# EAGLE board print_2 (EAGLE 5.11)
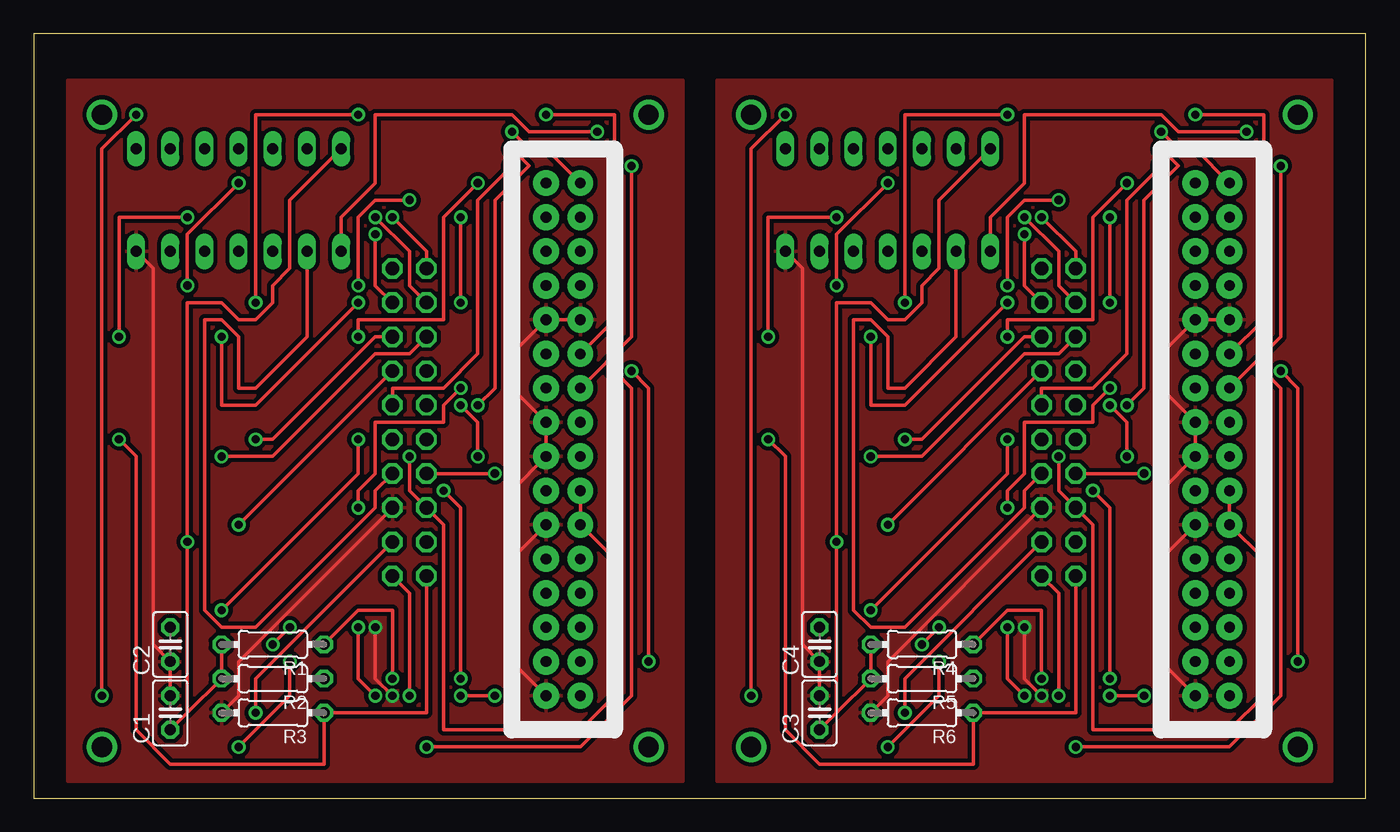
[diagram p0: board, top side]
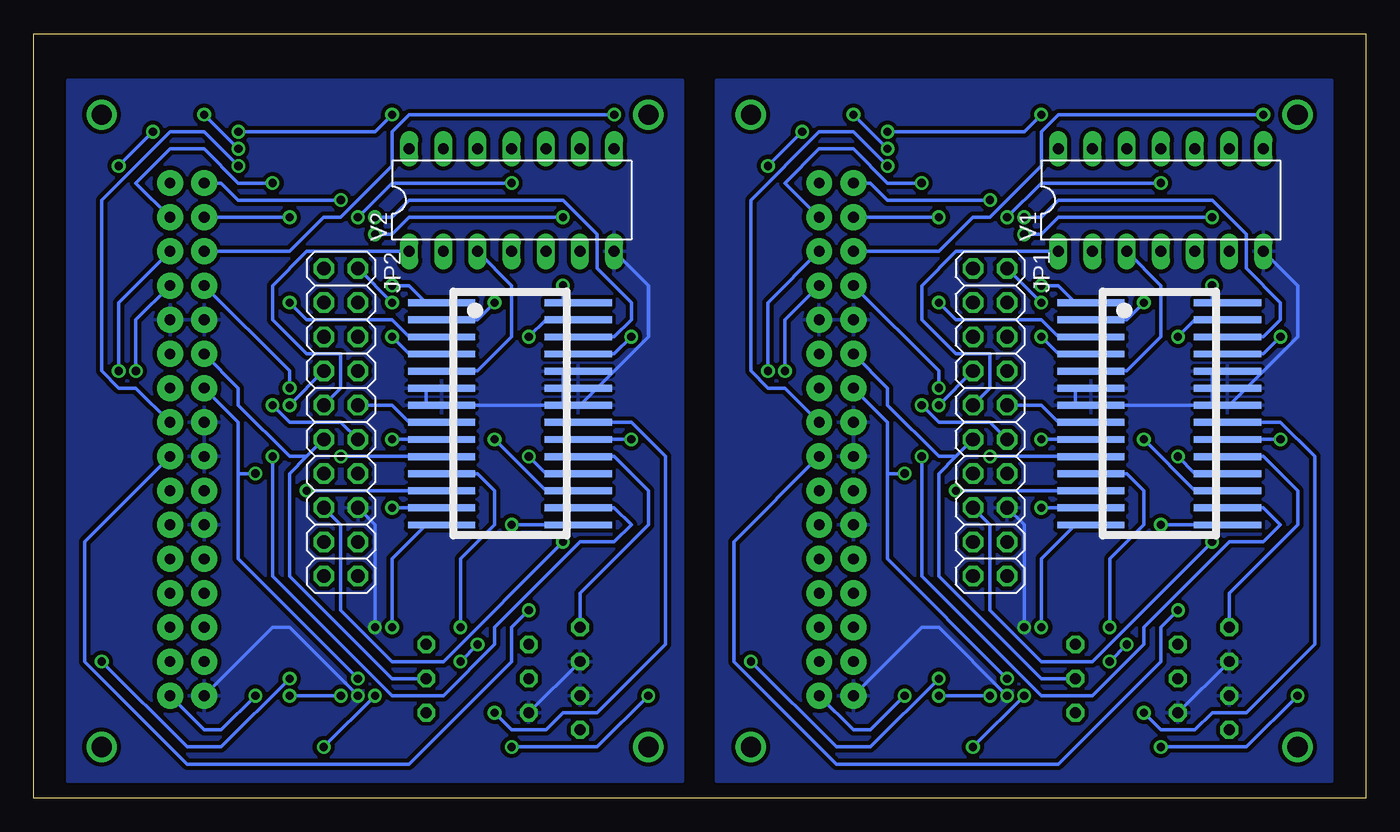
[diagram p1: board, bottom side, seen from below]

Size 99.04 x 56.82 mm. Coordinates in mm from the lower left corner, seen from the top.
Outline: 0,0 99.04,0 99.04,56.82 0,56.82 0,0
Copper layers (1*16): Top 0.035mm / dielectric 1.5mm / Bottom 0.035mm
Design rules "default": minimum track width 10mil, minimum drill 24mil, track to track 8mil, track to pad 8mil, pad to pad 8mil, via to via 8mil, smd to smd 8mil, copper to edge 40mil, drill to drill 8mil, minimum pad ring 10mil, minimum via ring 8mil, stop-mask expansion 4mil, vias tented up to drill 0mil, thermal gap 10mil

## Footprints (pad centres in the part's own frame; a part is rotated, then mirrored left to right if it is on the bottom)
C025-025X050 = drill 0.813 octagon: 1 -1.27,0; 2 1.27,0
2X10 = drill 1.016 octagon: 1 -11.43,-1.27; 2 -11.43,1.27; 3 -8.89,-1.27; 4 -8.89,1.27; 5 -6.35,-1.27; 6 -6.35,1.27; 7 -3.81,-1.27; 8 -3.81,1.27; 9 -1.27,-1.27; 10 -1.27,1.27; 11 1.27,-1.27; 12 1.27,1.27; 13 3.81,-1.27; 14 3.81,1.27; 15 6.35,-1.27; 16 6.35,1.27; 17 8.89,-1.27; 18 8.89,1.27; 19 11.43,-1.27; 20 11.43,1.27
0204/7 = drill 0.813 octagon: 1 -3.81,0; 2 3.81,0
AL422 = smd 5 x 0.51: 1 -5.21,7.61; 2 -5.21,6.34; 3 -5.21,5.07; 4 -5.21,3.8; 5 -5.21,2.53; 6 -5.21,1.26; 7 -5.21,-0.01; 8 -5.21,-1.28; 9 -5.21,-2.55; 10 -5.21,-3.82; 11 -5.21,-5.09; 12 -5.21,-6.36; 13 -5.21,-7.63; 14 -5.21,-8.9; 15 4.95,-8.9; 16 4.95,-7.63; 17 4.95,-6.36; 18 4.95,-5.09; 19 4.95,-3.82; 20 4.95,-2.55; 21 4.95,-1.28; 22 4.95,-0.01; 23 4.95,1.26; 24 4.95,2.53; 25 4.95,3.8; 26 4.95,5.07; 27 4.95,6.34; 28 4.95,7.61
C3088MODULE = drill 0.8 pad 1.93 round: P$1 -1.27,19.05; P$2 1.27,19.05; P$3 -1.27,16.51; P$4 1.27,16.51; P$5 -1.27,13.97; P$6 1.27,13.97; P$7 -1.27,11.43; P$8 1.27,11.43; P$9 -1.27,8.89; P$10 1.27,8.89; P$11 -1.27,6.35; P$12 1.27,6.35; P$13 -1.27,3.81; P$14 1.27,3.81; P$15 -1.27,1.27; P$16 1.27,1.27; P$17 -1.27,-1.27; P$18 1.27,-1.27; P$19 -1.27,-3.81; P$20 1.27,-3.81; P$21 -1.27,-6.35; P$22 1.27,-6.35; P$23 -1.27,-8.89; P$24 1.27,-8.89; P$25 -1.27,-11.43; P$26 1.27,-11.43; P$27 -1.27,-13.97; P$28 1.27,-13.97; P$29 -1.27,-16.51; P$30 1.27,-16.51; P$31 -1.27,-19.05; P$32 1.27,-19.05
DIL14 = drill 0.813 long: 1 -7.62,-3.81; 2 -5.08,-3.81; 3 -2.54,-3.81; 4 0,-3.81; 5 2.54,-3.81; 6 5.08,-3.81; 7 7.62,-3.81; 8 7.62,3.81; 9 5.08,3.81; 10 2.54,3.81; 11 0,3.81; 12 -2.54,3.81; 13 -5.08,3.81; 14 -7.62,3.81

## Placement (x,y rotation side)
C1  0.1uf  [C025-025X050]  10.16,6.35 90 top
C2  22uf  [C025-025X050]  10.16,11.43 90 top
C3  0.1uf  [C025-025X050]  58.42,6.35 90 top
C4  22uf  [C025-025X050]  58.42,11.43 90 top
JP1  [2X10]  27.94,27.94 270 bottom
JP2  [2X10]  76.2,27.94 270 bottom
R1  4k7  [0204/7]  17.78,11.43 180 top
R2  4k7  [0204/7]  17.78,8.89 180 top
R3  1k  [0204/7]  17.78,6.35 180 top
R4  4k7  [0204/7]  66.04,11.43 180 top
R5  4k7  [0204/7]  66.04,8.89 180 top
R6  1k  [0204/7]  66.04,6.35 180 top
U$1  AL422B  [AL422]  15.24,29.21 0 bottom
U$2  C3088MODULE  [C3088MODULE]  39.37,26.67 0 top
U$3  AL422B  [AL422]  63.5,29.21 0 bottom
U$4  C3088MODULE  [C3088MODULE]  87.63,26.67 0 top
V1  74HCT00N  [DIL14]  15.24,44.45 0 bottom
V2  74HCT00N  [DIL14]  63.5,44.45 0 bottom

## Library data of the parts
C1-C4 R1-R6 = rcl
JP1 JP2 = pinhead
U$1-U$4 = Tugas-Akhir-Sistem-Mikroprossesor
V1 V2 = 74ttl-din

## Nets
/FIFO_READ_RESET: JP1.18 U$1.21
/FIFO_READ_RESET1: JP2.18 U$3.21
DATA0: U$1.1 U$2.P$1
DATA1: U$1.2 U$2.P$2
DATA2: U$1.3 U$2.P$3
DATA3: U$1.4 U$2.P$4
DATA4: U$1.11 U$2.P$5
DATA5: U$1.12 U$2.P$6
DATA6: U$1.13 U$2.P$7
DATA7: U$1.14 U$2.P$8
DATA8: U$3.1 U$4.P$1
DATA9: U$3.2 U$4.P$2
DATA10: U$3.3 U$4.P$3
DATA11: U$3.4 U$4.P$4
DATA12: U$3.11 U$4.P$5
DATA13: U$3.12 U$4.P$6
DATA14: U$3.13 U$4.P$7
DATA15: U$3.14 U$4.P$8
FIFO_DATA_OUT0: JP1.1 U$1.28
FIFO_DATA_OUT1: JP1.2 U$1.27
FIFO_DATA_OUT2: JP1.3 U$1.26
FIFO_DATA_OUT3: JP1.4 U$1.25
FIFO_DATA_OUT4: JP1.5 U$1.18
FIFO_DATA_OUT5: JP1.6 U$1.17
FIFO_DATA_OUT6: JP1.7 U$1.16
FIFO_DATA_OUT7: JP1.8 U$1.15
FIFO_DATA_OUT8: JP2.1 U$3.28
FIFO_DATA_OUT9: JP2.2 U$3.27
FIFO_DATA_OUT10: JP2.3 U$3.26
FIFO_DATA_OUT11: JP2.4 U$3.25
FIFO_DATA_OUT12: JP2.5 U$3.18
FIFO_DATA_OUT13: JP2.6 U$3.17
FIFO_DATA_OUT14: JP2.7 U$3.16
FIFO_DATA_OUT15: JP2.8 U$3.15
FIFO_READ_CLOCK: JP1.19 R3.1 U$1.20
FIFO_READ_CLOCK1: JP2.19 R6.1 U$3.20
FIFO_WRITE_ENABLE: JP1.14 V1.2
FIFO_WRITE_ENABLE1: JP2.14 V2.2
GND: C1.2 C2.1 JP1.16 R3.2 U$1.6 U$1.7 U$1.22 U$1.23 U$1.24 U$2.P$9 U$2.P$10 U$2.P$15 U$2.P$17 U$2.P$21 U$2.P$31 V1.7
GND1: C3.2 C4.1 JP2.16 R6.2 U$3.6 U$3.7 U$3.22 U$3.23 U$3.24 U$4.P$9 U$4.P$10 U$4.P$15 U$4.P$17 U$4.P$21 U$4.P$31 V2.7
HORIZONTAL_REFERENCE: JP1.9 U$2.P$14 V1.1
HORIZONTAL_REFERENCE1: JP2.9 U$4.P$14 V2.1
N$1: JP1.20 U$2.P$32
N$2: U$1.5 V1.3
N$3: U$1.9 U$2.P$18
N$10: C2.2 U$1.19
N$11: U$3.5 V2.3
N$12: U$3.9 U$4.P$18
N$13: C4.2 U$3.19
N$14: JP2.20 U$4.P$32
OV6620_FODD: JP1.12 U$2.P$12
OV6620_FODD1: JP2.12 U$4.P$12
OV6620_SCL: JP1.13 R1.1 U$2.P$13
OV6620_SCL1: JP2.13 R4.1 U$4.P$13
OV6620_SDA: JP1.11 R2.1 U$2.P$11
OV6620_SDA1: JP2.11 R5.1 U$4.P$11
VCC: C1.1 JP1.15 R1.2 R2.2 U$1.10 U$2.P$20 U$2.P$22 V1.14
VCC1: C3.1 JP2.15 R4.2 R5.2 U$3.10 U$4.P$20 U$4.P$22 V2.14
VERTICAL_SYNCRONIZATION: JP1.10 U$1.8 U$2.P$16
VERTICAL_SYNCRONIZATION1: JP2.10 U$3.8 U$4.P$16

## Tracks (layer width: path | path; a pad name or v marks a point on that pad's centre or on a via)
/FIFO_READ_RESET  (via drill 0.61)
  Top 0.254: JP1.18 16.51,8.89 v16.51,6.35
  Bottom 0.254: v16.51,6.35 15.24,5.08 12.7,5.08 11.43,6.35 8.89,6.35 3.81,11.43 3.81,25.4 6.35,27.94 10.16,27.94 U$1.21
/FIFO_READ_RESET1  (via drill 0.61)
  Top 0.254: JP2.18 64.77,8.89 v64.77,6.35
  Bottom 0.254: v64.77,6.35 63.5,5.08 60.96,5.08 59.69,6.35 57.15,6.35 52.07,11.43 52.07,25.4 54.61,27.94 58.42,27.94 U$3.21
DATA0  (via drill 0.61)
  Top 0.254: v27.94,44.45 25.4,44.45 24.13,43.18 v24.13,38.1
  Bottom 0.254: U$2.P$1 36.83,45.72 35.56,44.45 v27.94,44.45 | v24.13,38.1 22.86,38.1 21.59,36.83 U$1.1
DATA1  (via drill 0.61)
  Top 0.254: U$2.P$2 38.1,48.26 36.83,48.26 v35.56,49.53 | v24.13,50.8 16.51,50.8 v16.51,36.83
  Bottom 0.254: v35.56,49.53 25.4,49.53 v24.13,50.8 | v16.51,36.83 17.78,35.56 20.32,35.56 U$1.2
DATA2  (via drill 0.61)
  Top 0.254: v31.75,36.83 v31.75,43.18
  Bottom 0.254: v31.75,43.18 U$2.P$3 | v31.75,36.83 30.48,35.56 24.13,35.56 22.86,34.29 21.59,34.29 U$1.3
DATA3  (via drill 0.61)
  Top 0.254: v33.02,45.72 30.48,43.18 30.48,35.56 24.13,35.56 v24.13,34.29
  Bottom 0.254: U$2.P$4 43.18,45.72 40.64,48.26 38.1,48.26 35.56,45.72 v33.02,45.72 | v24.13,34.29 22.86,33.02 21.59,33.02 U$1.4
DATA4  (via drill 0.61)
  Top 0.254: v7.62,50.8 5.08,48.26 v5.08,7.62 | v15.24,3.81 19.05,7.62 v19.05,10.16 | v17.78,11.43 v19.05,12.7
  Bottom 0.254: U$2.P$5 31.75,40.64 29.21,43.18 27.94,43.18 24.13,46.99 24.13,49.53 22.86,50.8 v7.62,50.8 | v5.08,7.62 8.89,3.81 v15.24,3.81 | v19.05,10.16 v17.78,11.43 | v19.05,12.7 19.05,17.78 16.51,20.32 16.51,22.86 17.78,24.13 20.32,24.13 U$1.11
DATA5  (via drill 0.61)
  Top 0.254: v44.45,31.75 45.72,30.48 v45.72,10.16 | v31.75,8.89 31.75,21.59 v30.48,22.86
  Bottom 0.254: U$2.P$6 44.45,36.83 v44.45,31.75 | v45.72,10.16 39.37,3.81 36.83,3.81 v31.75,8.89 | v30.48,22.86 21.59,22.86 U$1.12
DATA6  (via drill 0.61)
  Top 0.254: v31.75,30.48 30.48,29.21 30.48,27.94 25.4,27.94 25.4,24.13 24.13,22.86 v24.13,21.59
  Bottom 0.254: U$2.P$7 31.75,31.75 v31.75,30.48 | v24.13,21.59 21.59,21.59 U$1.13
DATA7  (via drill 0.61)
  Top 0.254: v43.18,31.75 44.45,30.48 44.45,7.62 40.64,3.81 v29.21,3.81 | v25.4,7.62 24.13,8.89 v24.13,12.7
  Bottom 0.254: U$2.P$8 43.18,35.56 v43.18,31.75 | v25.4,7.62 v29.21,3.81 | v24.13,12.7 24.13,17.78 21.59,20.32 U$1.14
DATA8  (via drill 0.61)
  Top 0.254: v76.2,44.45 73.66,44.45 72.39,43.18 v72.39,38.1
  Bottom 0.254: U$4.P$1 85.09,45.72 83.82,44.45 v76.2,44.45 | v72.39,38.1 71.12,38.1 69.85,36.83 U$3.1
DATA9  (via drill 0.61)
  Top 0.254: U$4.P$2 86.36,48.26 85.09,48.26 v83.82,49.53 | v72.39,50.8 64.77,50.8 v64.77,36.83
  Bottom 0.254: v83.82,49.53 73.66,49.53 v72.39,50.8 | v64.77,36.83 66.04,35.56 68.58,35.56 U$3.2
DATA10  (via drill 0.61)
  Top 0.254: v80.01,36.83 v80.01,43.18
  Bottom 0.254: v80.01,43.18 U$4.P$3 | v80.01,36.83 78.74,35.56 72.39,35.56 71.12,34.29 69.85,34.29 U$3.3
DATA11  (via drill 0.61)
  Top 0.254: v81.28,45.72 78.74,43.18 78.74,35.56 72.39,35.56 v72.39,34.29
  Bottom 0.254: U$4.P$4 91.44,45.72 88.9,48.26 86.36,48.26 83.82,45.72 v81.28,45.72 | v72.39,34.29 71.12,33.02 69.85,33.02 U$3.4
DATA12  (via drill 0.61)
  Top 0.254: v55.88,50.8 53.34,48.26 v53.34,7.62 | v63.5,3.81 67.31,7.62 v67.31,10.16 | v66.04,11.43 v67.31,12.7
  Bottom 0.254: U$4.P$5 80.01,40.64 77.47,43.18 76.2,43.18 72.39,46.99 72.39,49.53 71.12,50.8 v55.88,50.8 | v53.34,7.62 57.15,3.81 v63.5,3.81 | v67.31,10.16 v66.04,11.43 | v67.31,12.7 67.31,17.78 64.77,20.32 64.77,22.86 66.04,24.13 68.58,24.13 U$3.11
DATA13  (via drill 0.61)
  Top 0.254: v92.71,31.75 93.98,30.48 v93.98,10.16 | v80.01,8.89 80.01,21.59 v78.74,22.86
  Bottom 0.254: U$4.P$6 92.71,36.83 v92.71,31.75 | v93.98,10.16 87.63,3.81 85.09,3.81 v80.01,8.89 | v78.74,22.86 69.85,22.86 U$3.12
DATA14  (via drill 0.61)
  Top 0.254: v80.01,30.48 78.74,29.21 78.74,27.94 73.66,27.94 73.66,24.13 72.39,22.86 v72.39,21.59
  Bottom 0.254: U$4.P$7 80.01,31.75 v80.01,30.48 | v72.39,21.59 69.85,21.59 U$3.13
DATA15  (via drill 0.61)
  Top 0.254: v91.44,31.75 92.71,30.48 92.71,7.62 88.9,3.81 v77.47,3.81 | v73.66,7.62 72.39,8.89 v72.39,12.7
  Bottom 0.254: U$4.P$8 91.44,35.56 v91.44,31.75 | v73.66,7.62 v77.47,3.81 | v72.39,12.7 72.39,17.78 69.85,20.32 U$3.14
FIFO_DATA_OUT0  (via drill 0.61)
  Top 0.254: JP1.1 29.21,40.64 v26.67,43.18 | v15.24,45.72 11.43,41.91 v11.43,38.1
  Bottom 0.254: v26.67,43.18 24.13,45.72 v15.24,45.72 | v11.43,38.1 11.43,36.83 U$1.28
FIFO_DATA_OUT1  (via drill 0.61)
  Top 0.254: v24.13,36.83 16.51,29.21 13.97,29.21 v13.97,34.29
  Bottom 0.254: v24.13,36.83 JP1.2 | v13.97,34.29 12.7,35.56 11.43,35.56 U$1.27
FIFO_DATA_OUT2  (via drill 0.61)
  Top 0.254: JP1.3 27.94,38.1 27.94,40.64 v25.4,43.18
  Bottom 0.254: v25.4,43.18 24.13,43.18 22.86,44.45 11.43,44.45 8.89,41.91 8.89,39.37 6.35,36.83 6.35,35.56 7.62,34.29 10.16,34.29 U$1.26
FIFO_DATA_OUT3  (via drill 0.61)
  Top 0.254: JP1.4 25.4,38.1 v25.4,41.91 | v11.43,43.18 6.35,43.18 v6.35,34.29
  Bottom 0.254: v25.4,41.91 24.13,41.91 22.86,43.18 v11.43,43.18 | v6.35,34.29 7.62,33.02 10.16,33.02 U$1.25
FIFO_DATA_OUT4  (via drill 0.61)
  Top 0.254: JP1.5 27.94,33.02 25.4,33.02 17.78,25.4 v13.97,25.4
  Bottom 0.254: v13.97,25.4 12.7,24.13 11.43,24.13 U$1.18
FIFO_DATA_OUT5  (via drill 0.61)
  Top 0.254: JP1.6 25.4,34.29 17.78,26.67 v16.51,26.67
  Bottom 0.254: v16.51,26.67 12.7,22.86 11.43,22.86 U$1.17
FIFO_DATA_OUT6  (via drill 0.61)
  Top 0.254: v31.75,29.21 33.02,27.94 v33.02,25.4
  Bottom 0.254: v31.75,29.21 JP1.7 | v33.02,25.4 33.02,16.51 24.13,7.62 20.32,7.62 16.51,11.43 16.51,12.7 10.16,19.05 7.62,19.05 6.35,20.32 7.62,21.59 10.16,21.59 U$1.16
FIFO_DATA_OUT7  (via drill 0.61)
  Top 0.254: v15.24,20.32 JP1.8
  Bottom 0.254: v15.24,20.32 11.43,20.32 U$1.15
FIFO_DATA_OUT8  (via drill 0.61)
  Top 0.254: JP2.1 77.47,40.64 v74.93,43.18 | v63.5,45.72 59.69,41.91 v59.69,38.1
  Bottom 0.254: v74.93,43.18 72.39,45.72 v63.5,45.72 | v59.69,38.1 59.69,36.83 U$3.28
FIFO_DATA_OUT9  (via drill 0.61)
  Top 0.254: v72.39,36.83 64.77,29.21 62.23,29.21 v62.23,34.29
  Bottom 0.254: v72.39,36.83 JP2.2 | v62.23,34.29 60.96,35.56 59.69,35.56 U$3.27
FIFO_DATA_OUT10  (via drill 0.61)
  Top 0.254: JP2.3 76.2,38.1 76.2,40.64 v73.66,43.18
  Bottom 0.254: v73.66,43.18 72.39,43.18 71.12,44.45 59.69,44.45 57.15,41.91 57.15,39.37 54.61,36.83 54.61,35.56 55.88,34.29 58.42,34.29 U$3.26
FIFO_DATA_OUT11  (via drill 0.61)
  Top 0.254: JP2.4 73.66,38.1 v73.66,41.91 | v59.69,43.18 54.61,43.18 v54.61,34.29
  Bottom 0.254: v73.66,41.91 72.39,41.91 71.12,43.18 v59.69,43.18 | v54.61,34.29 55.88,33.02 58.42,33.02 U$3.25
FIFO_DATA_OUT12  (via drill 0.61)
  Top 0.254: JP2.5 76.2,33.02 73.66,33.02 66.04,25.4 v62.23,25.4
  Bottom 0.254: v62.23,25.4 60.96,24.13 59.69,24.13 U$3.18
FIFO_DATA_OUT13  (via drill 0.61)
  Top 0.254: JP2.6 73.66,34.29 66.04,26.67 v64.77,26.67
  Bottom 0.254: v64.77,26.67 60.96,22.86 59.69,22.86 U$3.17
FIFO_DATA_OUT14  (via drill 0.61)
  Top 0.254: v80.01,29.21 81.28,27.94 v81.28,25.4
  Bottom 0.254: v80.01,29.21 JP2.7 | v81.28,25.4 81.28,16.51 72.39,7.62 68.58,7.62 64.77,11.43 64.77,12.7 58.42,19.05 55.88,19.05 54.61,20.32 55.88,21.59 58.42,21.59 U$3.16
FIFO_DATA_OUT15  (via drill 0.61)
  Top 0.254: v63.5,20.32 JP2.8
  Bottom 0.254: v63.5,20.32 59.69,20.32 U$3.15
FIFO_READ_CLOCK  (via drill 0.61)
  Top 0.254: JP1.19 29.21,6.35 R3.1 21.59,2.54 10.16,2.54 7.62,5.08 7.62,25.4 v6.35,26.67
  Bottom 0.254: v6.35,26.67 10.16,26.67 U$1.20
FIFO_READ_CLOCK1  (via drill 0.61)
  Top 0.254: JP2.19 77.47,6.35 R6.1 69.85,2.54 58.42,2.54 55.88,5.08 55.88,25.4 v54.61,26.67
  Bottom 0.254: v54.61,26.67 58.42,26.67 U$3.20
FIFO_WRITE_ENABLE
  Top 0.254: V1.2 20.32,34.29 16.51,30.48 15.24,30.48 15.24,34.29 13.97,35.56 12.7,35.56 12.7,13.97 13.97,12.7 16.51,12.7 25.4,21.59 25.4,22.86 JP1.14
FIFO_WRITE_ENABLE1
  Top 0.254: V2.2 68.58,34.29 64.77,30.48 63.5,30.48 63.5,34.29 62.23,35.56 60.96,35.56 60.96,13.97 62.23,12.7 64.77,12.7 73.66,21.59 73.66,22.86 JP2.14
GND  (via drill 0.61)
  Top 0.254: U$2.P$10 U$2.P$9 35.56,33.02 35.56,30.48 U$2.P$15 U$2.P$17 35.56,22.86 35.56,17.78 | U$2.P$31 35.56,10.16 35.56,17.78 | 35.56,17.78 U$2.P$21 | C1.2 C2.1 8.89,11.43 8.89,39.37 V1.7 | JP1.16 15.24,10.16 15.24,7.62 R3.2 | v26.67,7.62 25.4,8.89 v25.4,12.7
  Bottom 0.254: U$1.6 21.59,30.48 21.59,29.21 U$1.7 20.32,29.21 11.43,29.21 | 11.43,30.48 11.43,31.75 U$1.24 | V1.7 5.08,38.1 5.08,34.29 10.16,29.21 U$1.22 11.43,29.21 | 11.43,29.21 11.43,30.48 | 11.43,30.48 U$1.23 | C2.1 R3.2 | U$2.P$31 33.02,12.7 31.75,12.7 v26.67,7.62 | v25.4,12.7 25.4,20.32 JP1.16
  pour Bottom (isolate 0.305): 2.54,53.34 48.26,53.34 48.26,1.27 2.54,1.27
  pour Top (isolate 0.305): 2.54,53.34 48.26,53.34 48.26,1.27 2.54,1.27
GND1  (via drill 0.61)
  Top 0.254: U$4.P$10 U$4.P$9 83.82,33.02 83.82,30.48 U$4.P$15 U$4.P$17 83.82,22.86 83.82,17.78 | U$4.P$31 83.82,10.16 83.82,17.78 | 83.82,17.78 U$4.P$21 | C3.2 C4.1 57.15,11.43 57.15,39.37 V2.7 | JP2.16 63.5,10.16 63.5,7.62 R6.2 | v74.93,7.62 73.66,8.89 v73.66,12.7
  Bottom 0.254: U$3.6 69.85,30.48 69.85,29.21 U$3.7 68.58,29.21 59.69,29.21 | 59.69,30.48 59.69,31.75 U$3.24 | V2.7 53.34,38.1 53.34,34.29 58.42,29.21 U$3.22 59.69,29.21 | 59.69,29.21 59.69,30.48 | 59.69,30.48 U$3.23 | C4.1 R6.2 | U$4.P$31 81.28,12.7 80.01,12.7 v74.93,7.62 | v73.66,12.7 73.66,20.32 JP2.16
  pour Bottom (isolate 0.305): 50.8,53.34 96.52,53.34 96.52,1.27 50.8,1.27
  pour Top (isolate 0.305): 50.8,53.34 96.52,53.34 96.52,1.27 50.8,1.27
HORIZONTAL_REFERENCE  (via drill 0.61)
  Top 0.254: U$2.P$14 44.45,34.29 v44.45,46.99 | v41.91,49.53 36.83,49.53 35.56,50.8 25.4,50.8 25.4,45.72 22.86,43.18 V1.1
  Bottom 0.254: V1.1 30.48,40.64 33.02,38.1 33.02,35.56 30.48,33.02 27.94,33.02 27.94,30.48 JP1.9 | v41.91,49.53 v44.45,46.99
HORIZONTAL_REFERENCE1  (via drill 0.61)
  Top 0.254: U$4.P$14 92.71,34.29 v92.71,46.99 | v90.17,49.53 85.09,49.53 83.82,50.8 73.66,50.8 73.66,45.72 71.12,43.18 V2.1
  Bottom 0.254: V2.1 78.74,40.64 81.28,38.1 81.28,35.56 78.74,33.02 76.2,33.02 76.2,30.48 JP2.9 | v90.17,49.53 v92.71,46.99
N$1  (via drill 0.61)
  Top 0.254: JP1.20 27.94,15.24 v27.94,7.62 | v31.75,7.62 v34.29,7.62
  Bottom 0.254: v27.94,7.62 v31.75,7.62 | v34.29,7.62 36.83,5.08 38.1,5.08 U$2.P$32
N$2
  Bottom 0.254: V1.3 15.24,38.1 15.24,34.29 17.78,31.75 20.32,31.75 U$1.5
N$3  (via drill 0.61)
  Top 0.254: v13.97,13.97 24.13,24.13 v24.13,26.67
  Bottom 0.254: U$2.P$18 46.99,19.05 46.99,10.16 39.37,2.54 22.86,2.54 15.24,10.16 15.24,12.7 v13.97,13.97 | v24.13,26.67 21.59,26.67 U$1.9
N$4  (via drill 1.5 pad 1.78)
  other vias: 5.08,50.8
N$5  (via drill 1.5 pad 1.78)
  other vias: 45.72,50.8
N$6  (via drill 1.5 pad 1.78)
  other vias: 5.08,3.81
N$7  (via drill 1.5 pad 1.78)
  other vias: 45.72,3.81
N$8
  pour Bottom (isolate 0.305): 2.54,53.34 48.26,53.34 48.26,1.27 2.54,1.27
N$9
  pour Top (isolate 0.305): 2.54,53.34 48.26,53.34 48.26,1.27 2.54,1.27
N$10
  Bottom 0.254: C2.2 10.16,15.24 5.08,20.32 5.08,22.86 7.62,25.4 10.16,25.4 U$1.19
N$11
  Bottom 0.254: V2.3 63.5,38.1 63.5,34.29 66.04,31.75 68.58,31.75 U$3.5
N$12  (via drill 0.61)
  Top 0.254: v62.23,13.97 72.39,24.13 v72.39,26.67
  Bottom 0.254: U$4.P$18 95.25,19.05 95.25,10.16 87.63,2.54 71.12,2.54 63.5,10.16 63.5,12.7 v62.23,13.97 | v72.39,26.67 69.85,26.67 U$3.9
N$13
  Bottom 0.254: C4.2 58.42,15.24 53.34,20.32 53.34,22.86 55.88,25.4 58.42,25.4 U$3.19
N$14  (via drill 0.61)
  Top 0.254: JP2.20 76.2,15.24 v76.2,7.62 | v80.01,7.62 v82.55,7.62
  Bottom 0.254: v76.2,7.62 v80.01,7.62 | v82.55,7.62 85.09,5.08 86.36,5.08 U$4.P$32
N$15  (via drill 1.5 pad 1.78)
  other vias: 53.34,50.8
N$16  (via drill 1.5 pad 1.78)
  other vias: 93.98,50.8
N$17  (via drill 1.5 pad 1.78)
  other vias: 53.34,3.81
N$18  (via drill 1.5 pad 1.78)
  other vias: 93.98,3.81
N$19
  pour Bottom (isolate 0.305): 50.8,53.34 96.52,53.34 96.52,1.27 50.8,1.27
N$20
  pour Top (isolate 0.305): 50.8,53.34 96.52,53.34 96.52,1.27 50.8,1.27
OV6620_FODD  (via drill 0.61)
  Top 0.254: v33.02,29.21 34.29,30.48 34.29,44.45 36.83,46.99 v35.56,48.26 | v38.1,50.8 43.18,50.8 43.18,35.56 U$2.P$12
  Bottom 0.254: JP1.12 27.94,27.94 31.75,27.94 v33.02,29.21 | v35.56,48.26 v38.1,50.8
OV6620_FODD1  (via drill 0.61)
  Top 0.254: v81.28,29.21 82.55,30.48 82.55,44.45 85.09,46.99 v83.82,48.26 | v86.36,50.8 91.44,50.8 91.44,35.56 U$4.P$12
  Bottom 0.254: JP2.12 76.2,27.94 80.01,27.94 v81.28,29.21 | v83.82,48.26 v86.36,50.8
OV6620_SCL  (via drill 0.61)
  Top 0.254: R1.1 24.13,13.97 26.67,13.97 v26.67,8.89 | v34.29,24.13 JP1.13
  Bottom 0.254: v26.67,8.89 35.56,17.78 35.56,24.13 | 35.56,24.13 35.56,27.94 U$2.P$13 | 35.56,24.13 v34.29,24.13
OV6620_SCL1  (via drill 0.61)
  Top 0.254: R4.1 72.39,13.97 74.93,13.97 v74.93,8.89 | v82.55,24.13 JP2.13
  Bottom 0.254: v74.93,8.89 83.82,17.78 83.82,24.13 | 83.82,24.13 83.82,27.94 U$4.P$13 | 83.82,24.13 v82.55,24.13
OV6620_SDA
  Bottom 0.254: R2.1 24.13,8.89 31.75,16.51 31.75,24.13 30.48,25.4 | 30.48,25.4 JP1.11 | U$2.P$11 35.56,30.48 35.56,29.21 31.75,25.4 30.48,25.4
OV6620_SDA1
  Bottom 0.254: R5.1 72.39,8.89 80.01,16.51 80.01,24.13 78.74,25.4 | 78.74,25.4 JP2.11 | U$4.P$11 83.82,30.48 83.82,29.21 80.01,25.4 78.74,25.4
VCC  (via drill 0.61)
  Top 0.254: U$2.P$20 U$2.P$22 43.18,17.78 43.18,7.62 40.64,5.08 30.48,5.08 30.48,20.32 JP1.15 27.94,22.86 v27.94,25.4 | 11.43,6.35 R2.2 R1.2 | 11.43,6.35 C1.1 | V1.14 19.05,44.45 19.05,39.37 17.78,38.1 17.78,36.83 16.51,35.56 15.24,35.56 13.97,36.83 11.43,36.83 v11.43,19.05 11.43,6.35
  Bottom 0.254: v27.94,25.4 21.59,25.4 U$1.10 | JP1.15 27.94,20.32 27.94,13.97 24.13,10.16 20.32,10.16 v11.43,19.05
VCC1  (via drill 0.61)
  Top 0.254: U$4.P$20 U$4.P$22 91.44,17.78 91.44,7.62 88.9,5.08 78.74,5.08 78.74,20.32 JP2.15 76.2,22.86 v76.2,25.4 | 59.69,6.35 R5.2 R4.2 | C3.1 59.69,6.35 | V2.14 67.31,44.45 67.31,39.37 66.04,38.1 66.04,36.83 64.77,35.56 63.5,35.56 62.23,36.83 59.69,36.83 v59.69,19.05 59.69,6.35
  Bottom 0.254: v76.2,25.4 69.85,25.4 U$3.10 | JP2.15 76.2,20.32 76.2,13.97 72.39,10.16 68.58,10.16 v59.69,19.05
VERTICAL_SYNCRONIZATION  (via drill 0.61)
  Top 0.254: v35.56,46.99 33.02,44.45 33.02,33.02 30.48,30.48 26.67,30.48 JP1.10
  Bottom 0.254: JP1.10 24.13,29.21 22.86,27.94 21.59,27.94 U$1.8 | U$2.P$16 43.18,30.48 44.45,30.48 45.72,31.75 45.72,44.45 40.64,49.53 38.1,49.53 v35.56,46.99
VERTICAL_SYNCRONIZATION1  (via drill 0.61)
  Top 0.254: v83.82,46.99 81.28,44.45 81.28,33.02 78.74,30.48 74.93,30.48 JP2.10
  Bottom 0.254: JP2.10 72.39,29.21 71.12,27.94 69.85,27.94 U$3.8 | U$4.P$16 91.44,30.48 92.71,30.48 93.98,31.75 93.98,44.45 88.9,49.53 86.36,49.53 v83.82,46.99